# Altium PCB DIOT_SYS_extender_card.PcbDoc (part 5 of 6)
Units mm, origin at the board's own origin, x right, y up, seen from the top; angles counter-clockwise.
Board outline 280.04 x 100 mm, 6 copper layers (Top Layer, L2GND, L3, L4, L5GND, Bottom Layer), stack 1.558 mm thick; 18 components, 344 nets, 1062 pads, 179 vias.
Unrouted connection lines stored in the file: 389.
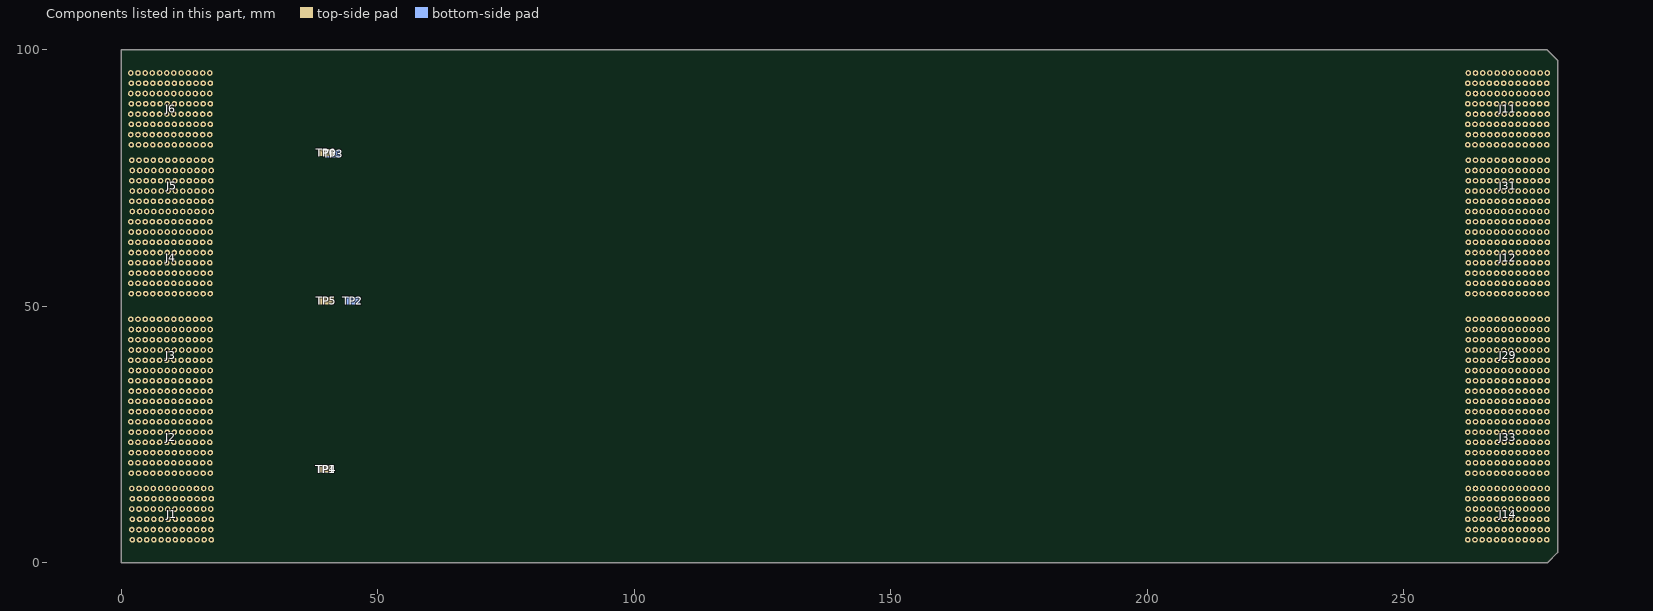
[diagram p9: the components of this part, seen from the top]

## Other copper (continued)
Bottom Layer:
  rectangle net SHARED_BUS_2: 42.545,8.951 42.774,9.212
  rectangle net SHARED_BUS_4: 42.545,9.346 42.878,9.514
  rectangle net GA3: 52.608,9.845 52.921,10.086
  rectangle net GA2: 52.596,10.222 52.928,10.466
  rectangle net PWR_FAIL_N: 47.651,12.132 47.853,12.389
  rectangle net PWRBTN_N: 47.518,12.524 47.923,12.755
  rectangle net SLOT1.LVDS_4_N: 42.609,14.266 42.884,14.387
  rectangle net SLOT1.LVDS_4_P: 42.571,14.522 42.878,14.634
  rectangle net SLOT1.LVDS_6_N: 52.515,16.562 52.919,16.759
  rectangle net SLOT1.LVDS_10_N: 47.665,18.711 48.003,18.895
  rectangle net SLOT1.LVDS_10_P: 47.651,19.03 48.097,19.081
  rectangle net SLOT2.LVDS_6_N: 42.545,21.4 42.911,21.57
  rectangle net SLOT2.LVDS_6_P: 42.526,21.705 42.853,21.825
  rectangle net SLOT2.LVDS_10_N: 52.515,23.338 52.86,23.535
  rectangle net SLOT2.LVDS_10_P: 52.515,23.674 52.86,23.818
  rectangle net 4_DIFF_15_N: 47.505,25.366 47.76,25.482
  rectangle net 4_DIFF_15_P: 47.505,25.616 47.757,25.735
  rectangle net 8_DIFF_15_N: 42.609,27.365 42.819,27.485
  rectangle net 8_DIFF_15_P: 42.49,27.619 42.818,27.734
  rectangle net F_IO0: 52.596,29.3 52.869,29.491
  rectangle net P_IO0: 52.515,29.626 52.933,29.738
  rectangle net F_IO1: 47.505,31.363 47.825,31.6
  rectangle net SLOT4.LVDS_2_N: 42.609,33.22 42.857,33.336
  rectangle net SLOT4.LVDS_2_P: 42.545,33.471 42.849,33.587
  rectangle net SLOT8.LVDS_2_N: 52.624,35.351 52.829,35.469
  rectangle net SLOT8.LVDS_2_P: 52.605,35.604 52.99,35.663
  rectangle net SLOT3.LVDS_1_N: 47.518,37.183 47.885,37.33
  rectangle net SLOT3.LVDS_1_P: 47.25,37.465 47.908,37.583
  rectangle net SLOT5.LVDS_1_N: 42.539,39.183 42.901,39.365
  rectangle net SLOT5.LVDS_1_P: 42.539,39.499 42.85,39.615
  rectangle net SLOT7.LVDS_1_P: 52.539,41.56 52.822,41.675
  rectangle net SLOT7.LVDS_1_N: 52.531,41.31 52.819,41.425
  rectangle net SLOT2.LVDS_4_N: 47.518,43.283 47.845,43.427
  rectangle net SLOT2.LVDS_4_P: 47.505,43.579 47.845,43.763
  rectangle net SLOT4.LVDS_4_N: 42.49,45.268 42.956,45.388
  rectangle net SLOT4.LVDS_4_P: 42.49,45.523 42.934,45.698
  rectangle net SLOT6.LVDS_4_N: 52.515,47.401 52.84,47.56
  rectangle net SLOT6.LVDS_4_P: 52.515,47.695 52.84,47.881
  rectangle net SLOT8.LVDS_4_N: 47.518,48.893 47.93,49.064
  rectangle net SLOT8.LVDS_4_P: 47.549,49.199 47.93,49.373
  rectangle net SLOT3.LVDS_6_N: 42.49,53.283 43.036,53.443
  rectangle net SLOT3.LVDS_6_P: 42.545,53.577 43.003,53.69
  rectangle net SLOT3.LVDS_10_N: 52.605,54.417 52.877,54.535
  rectangle net SLOT4.LVDS_6_N: 47.505,56.338 47.978,56.504
  rectangle net SLOT4.LVDS_6_P: 47.56,56.638 47.97,56.75
  rectangle net SLOT4.LVDS_10_N: 42.545,58.446 43,58.566
  rectangle net SLOT4.LVDS_10_P: 42.49,58.7 43.094,58.807
  rectangle net SLOT5.LVDS_6_N: 52.515,60.496 52.915,60.613
  rectangle net SLOT5.LVDS_6_P: 52.515,60.748 52.84,60.918
  rectangle net SLOT5.LVDS_10_N: 47.549,62.389 47.971,62.506
  rectangle net SLOT5.LVDS_10_P: 47.514,62.64 47.978,62.818
  rectangle net SLOT6.LVDS_6_N: 42.545,64.338 42.901,64.513
  rectangle net SLOT6.LVDS_6_P: 42.539,64.648 42.901,64.818
  rectangle net SLOT6.LVDS_10_N: 52.54,66.338 52.925,66.52
  rectangle net SLOT6.LVDS_10_P: 52.574,66.655 53.013,66.771
  rectangle net SLOT7.LVDS_6_N: 47.568,68.438 47.885,68.59
  rectangle net SLOT7.LVDS_6_P: 47.607,68.724 47.885,68.917
  rectangle net SLOT7.LVDS_10_N: 42.597,70.338 42.901,70.503
  rectangle net SLOT7.LVDS_10_P: 42.539,70.637 42.956,70.756
  rectangle net SLOT8.LVDS_6_N: 52.664,72.389 52.868,72.51
  rectangle net SLOT8.LVDS_6_P: 52.629,72.645 52.866,72.764
  rectangle net SLOT8.LVDS_10_N: 47.607,74.361 48.001,74.48
  rectangle net SLOT8.LVDS_10_P: 47.584,74.615 47.912,74.79
  rectangle net 4_PE_CLK_N: 52.629,77.328 52.854,77.448
  rectangle net 4_PE_CLK_P: 52.629,77.583 53.023,77.696
  rectangle net 8_PE_CLK_N: 47.584,79.438 47.912,79.608
  rectangle net 8_PE_CLK_P: 47.625,79.739 47.97,79.856
  rectangle net 5_SERVMOD: 52.619,80.956 52.939,81.177
  rectangle net SLOT1.LVDS_14_N: 47.549,82.507 47.816,82.626
  rectangle net SLOT1.LVDS_14_P: 47.481,82.761 47.811,82.874
  rectangle net SLOT2.LVDS_14_N: 42.562,83.325 42.811,83.445
  rectangle net SLOT2.LVDS_14_P: 42.49,83.579 42.881,83.696
  rectangle net SLOT3.LVDS_14_P: 52.582,85.685 52.788,85.799
  rectangle net SLOT3.LVDS_14_N: 52.515,85.43 52.784,85.55
  rectangle net SLOT4.LVDS_14_N: 47.549,87.397 47.816,87.515
  rectangle net SLOT4.LVDS_14_P: 47.479,87.65 47.812,87.77
  rectangle net SLOT5.LVDS_14_N: 42.562,89.384 42.828,89.5
  rectangle net SLOT5.LVDS_14_P: 42.49,89.637 42.885,89.818
  rectangle net SLOT6.LVDS_14_N: 52.54,91.319 52.83,91.435
  rectangle net SLOT6.LVDS_14_P: 52.535,91.57 52.925,91.718
  rectangle net SLOT7.LVDS_14_N: 47.479,93.338 47.8,93.492
  rectangle net SLOT7.LVDS_14_P: 47.3,93.626 47.729,93.743
  rectangle net SLOT8.LVDS_14_N: 42.49,95.493 42.74,95.61
  rectangle net SLOT8.LVDS_14_P: 42.49,95.745 42.739,95.864
  region net SHARED_BUS_2: 42.92,8.92 42.774,9.095 42.526,8.888 42.671,8.713
  region net GA3: 53.002,9.793 52.857,9.969 52.608,9.762 52.754,9.587
  region net PWR_FAIL_N: 47.998,12.092 47.853,12.267 47.604,12.061 47.75,11.885
  region net SLOT1.LVDS_4_N: 43.03,14.091 42.884,14.266 42.636,14.06 42.781,13.885
  region net SLOT1.LVDS_6_N: 53.022,16.464 52.877,16.639 52.628,16.432 52.774,16.257
  region net SLOT1.LVDS_10_N: 48.097,18.603 47.951,18.778 47.703,18.571 47.848,18.396
  region net SLOT2.LVDS_6_N: 42.999,21.276 42.854,21.451 42.605,21.245 42.751,21.069
  region net SLOT2.LVDS_10_N: 52.933,23.245 52.787,23.42 52.539,23.214 52.684,23.039
  region net 4_DIFF_15_N: 47.905,25.191 47.76,25.366 47.511,25.159 47.657,24.984
  region net 8_DIFF_15_N: 42.965,27.19 42.819,27.365 42.571,27.159 42.716,26.983
  region net F_IO0: 52.954,29.2 52.808,29.375 52.56,29.168 52.705,28.993
  region net SLOT4.LVDS_2_N: 43.003,33.045 42.857,33.22 42.609,33.013 42.755,32.838
  region net SLOT8.LVDS_2_N: 52.975,35.176 52.829,35.351 52.581,35.145 52.727,34.969
  region net SLOT3.LVDS_1_N: 47.951,37.038 47.805,37.213 47.557,37.006 47.703,36.831
  region net SLOT5.LVDS_1_N: 42.993,39.072 42.847,39.247 42.599,39.04 42.745,38.865
  region net SLOT7.LVDS_1_N: 52.965,41.134 52.819,41.31 52.571,41.103 52.717,40.928
  region net SLOT2.LVDS_4_N: 47.912,43.132 47.767,43.308 47.518,43.101 47.664,42.926
  region net SLOT4.LVDS_4_N: 42.94,45.092 42.794,45.268 42.545,45.061 42.691,44.886
  region net SLOT6.LVDS_4_N: 52.923,47.262 52.777,47.437 52.529,47.23 52.674,47.055
  region net SLOT8.LVDS_4_N: 48.001,48.776 47.855,48.951 47.607,48.744 47.752,48.569
  region net SLOT3.LVDS_6_N: 42.987,53.154 42.841,53.329 42.593,53.122 42.738,52.947
  region net SLOT3.LVDS_10_N: 53.023,54.242 52.877,54.417 52.629,54.211 52.774,54.036
  region net SLOT4.LVDS_6_N: 47.962,56.211 47.816,56.386 47.568,56.179 47.714,56.004
  region net SLOT4.LVDS_10_N: 43.036,58.271 42.89,58.446 42.642,58.24 42.787,58.064
  region net SLOT5.LVDS_6_N: 52.909,60.321 52.763,60.496 52.515,60.289 52.66,60.114
  region net SLOT5.LVDS_10_N: 47.958,62.214 47.812,62.389 47.564,62.182 47.709,62.007
  region net SLOT6.LVDS_6_N: 42.994,64.22 42.848,64.395 42.6,64.189 42.745,64.014
  region net SLOT6.LVDS_10_N: 53.005,66.225 52.859,66.4 52.611,66.194 52.757,66.019
  region net SLOT7.LVDS_6_N: 47.951,68.3 47.806,68.475 47.557,68.268 47.703,68.093
  region net SLOT7.LVDS_10_N: 43,70.213 42.854,70.388 42.606,70.182 42.751,70.006
  region net SLOT8.LVDS_6_N: 53.013,72.214 52.868,72.389 52.619,72.183 52.765,72.008
  region net SLOT8.LVDS_10_N: 47.971,74.186 47.825,74.361 47.577,74.154 47.722,73.979
  region net 4_PE_CLK_N: 52.999,77.153 52.854,77.328 52.605,77.122 52.751,76.947
  region net 8_PE_CLK_N: 47.97,79.309 47.824,79.484 47.576,79.277 47.721,79.102
  region net SLOT2.LVDS_14_N: 42.956,83.15 42.811,83.325 42.562,83.119 42.708,82.943
  region net SLOT1.LVDS_14_N: 47.962,82.332 47.816,82.507 47.568,82.3 47.713,82.125
  region net SLOT3.LVDS_14_N: 52.929,85.255 52.784,85.43 52.535,85.223 52.681,85.048
  region net SLOT4.LVDS_14_N: 47.962,87.222 47.816,87.397 47.568,87.191 47.713,87.016
  region net SLOT5.LVDS_14_N: 42.973,89.208 42.828,89.384 42.579,89.177 42.725,89.002
  region net SLOT6.LVDS_14_N: 52.976,91.144 52.83,91.319 52.582,91.113 52.727,90.937
  region net SLOT7.LVDS_14_N: 47.873,93.196 47.728,93.371 47.479,93.165 47.625,92.989
  region net SLOT8.LVDS_14_N: 42.885,95.318 42.74,95.493 42.491,95.286 42.637,95.111
  region net SHARED_BUS_4: 42.773,9.462 42.918,9.637 42.67,9.844 42.524,9.668
  region net PWRBTN_N: 47.845,12.645 47.991,12.82 47.742,13.026 47.597,12.851
  region net GA2: 52.845,10.34 52.99,10.515 52.742,10.722 52.596,10.547
  region net PWR_FAIL_N: 47.75,12.389 47.15,12.389 47.15,11.889 47.75,11.889
  region net PWRBTN_N: 47.75,13.024 47.15,13.024 47.15,12.524 47.75,12.524
  region net SLOT1.LVDS_4_P: 42.878,14.634 43.024,14.809 42.775,15.016 42.629,14.84
  region net SLOT1.LVDS_6_P: 52.882,17.013 53.028,17.188 52.779,17.395 52.634,17.22
  region net SLOT1.LVDS_10_P: 47.947,19.145 48.093,19.32 47.844,19.527 47.699,19.352
  region net SLOT2.LVDS_6_P: 42.853,21.825 42.999,22 42.75,22.207 42.605,22.032
  region net SLOT2.LVDS_10_P: 52.788,23.794 52.933,23.969 52.685,24.176 52.539,24.001
  region net 4_DIFF_15_P: 47.757,25.735 47.903,25.91 47.654,26.116 47.509,25.941
  region net 8_DIFF_15_P: 42.818,27.734 42.963,27.909 42.715,28.115 42.569,27.94
  region net P_IO0: 52.808,29.738 52.953,29.914 52.705,30.12 52.559,29.945
  region net F_IO1: 47.753,31.479 47.899,31.654 47.651,31.861 47.505,31.686
  region net SLOT4.LVDS_2_P: 42.849,33.587 42.995,33.762 42.746,33.968 42.601,33.793
  region net SLOT8.LVDS_2_P: 52.831,35.724 52.977,35.899 52.728,36.106 52.583,35.931
  region net SLOT3.LVDS_1_P: 47.807,37.583 47.952,37.758 47.704,37.965 47.558,37.79
  region net SLOT5.LVDS_1_P: 42.85,39.615 42.995,39.79 42.747,39.997 42.601,39.822
  region net SLOT7.LVDS_1_P: 52.822,41.675 52.968,41.85 52.719,42.056 52.574,41.881
  region net SLOT2.LVDS_4_P: 47.762,43.678 47.908,43.853 47.659,44.059 47.514,43.884
  region net SLOT4.LVDS_4_P: 42.788,45.643 42.934,45.818 42.685,46.025 42.539,45.85
  region net SLOT6.LVDS_4_P: 52.779,47.813 52.925,47.988 52.676,48.195 52.531,48.019
  region net SLOT8.LVDS_4_P: 47.856,49.318 48.001,49.493 47.753,49.7 47.607,49.525
  region net SLOT3.LVDS_6_P: 42.833,53.69 42.979,53.865 42.73,54.072 42.585,53.897
  region net SLOT3.LVDS_10_P: 52.872,54.789 53.018,54.964 52.769,55.171 52.624,54.996
  region net SLOT4.LVDS_6_P: 47.809,56.75 47.955,56.925 47.706,57.132 47.56,56.957
  region net SLOT4.LVDS_10_P: 42.889,58.807 43.035,58.982 42.786,59.189 42.641,59.014
  region net SLOT5.LVDS_6_P: 52.769,60.866 52.915,61.041 52.666,61.248 52.521,61.073
  region net SLOT5.LVDS_10_P: 47.812,62.757 47.958,62.932 47.709,63.138 47.564,62.963
  region net SLOT6.LVDS_6_P: 42.851,64.764 42.997,64.939 42.748,65.145 42.603,64.97
  region net SLOT6.LVDS_10_P: 52.86,66.771 53.006,66.946 52.757,67.153 52.612,66.977
  region net SLOT7.LVDS_6_P: 47.797,68.847 47.943,69.022 47.695,69.229 47.549,69.054
  region net SLOT7.LVDS_10_P: 42.846,70.756 42.991,70.931 42.743,71.138 42.597,70.963
  region net SLOT8.LVDS_6_P: 52.866,72.764 53.012,72.939 52.763,73.145 52.617,72.97
  region net SLOT8.LVDS_10_P: 47.825,74.734 47.971,74.909 47.723,75.115 47.577,74.94
  region net 3_SERVMOD: 42.829,76.206 42.975,76.381 42.726,76.588 42.581,76.413
  region net 4_PE_CLK_P: 52.859,77.696 53.004,77.871 52.756,78.077 52.61,77.902
  region net 8_PE_CLK_P: 47.832,79.856 47.978,80.031 47.73,80.238 47.584,80.063
  region net 5_SERVMOD: 52.877,81.079 53.023,81.254 52.774,81.461 52.629,81.286
  region net SLOT1.LVDS_14_P: 47.811,82.874 47.957,83.049 47.708,83.256 47.563,83.081
  region net SLOT2.LVDS_14_P: 42.816,83.696 42.962,83.871 42.714,84.078 42.568,83.903
  region net SLOT3.LVDS_14_P: 52.788,85.799 52.934,85.974 52.685,86.181 52.54,86.006
  region net SLOT4.LVDS_14_P: 47.812,87.77 47.958,87.945 47.709,88.151 47.564,87.976
  region net SLOT5.LVDS_14_P: 42.828,89.754 42.973,89.929 42.725,90.136 42.579,89.961
  region net SLOT6.LVDS_14_P: 52.835,91.689 52.981,91.864 52.732,92.071 52.587,91.896
  region net SLOT7.LVDS_14_P: 47.729,93.743 47.875,93.918 47.626,94.125 47.481,93.95
  region net SLOT8.LVDS_14_P: 42.739,95.864 42.885,96.039 42.636,96.246 42.49,96.071
  region net 8_SERVMOD: 33.07,78.39 32.47,78.39 32.47,77.89 33.07,77.89
  region net SHARED_BUS_2: 42.673,9.212 42.073,9.212 42.073,8.712 42.673,8.712
  region net SHARED_BUS_4: 42.673,9.846 42.073,9.846 42.073,9.346 42.673,9.346
  region net SLOT1.LVDS_4_N: 42.782,14.387 42.182,14.387 42.182,13.887 42.782,13.887
  region net GA2: 52.751,10.722 52.151,10.722 52.151,10.222 52.751,10.222
  region net GA3: 52.751,10.087 52.151,10.087 52.151,9.587 52.751,9.587
  region net SLOT1.LVDS_5_P: 37.956,11.411 37.356,11.411 37.356,10.911 37.956,10.911
  region net SLOT1.LVDS_5_N: 37.956,12.046 37.356,12.046 37.356,11.546 37.956,11.546
  region net SLOT1.LVDS_0_N: 27.952,9.451 27.352,9.451 27.352,8.951 27.952,8.951
  region net P12V0: 27.975,5.25 27.375,5.25 27.375,4.75 27.975,4.75
  region net 3_SERVMOD: 42.734,76.584 42.134,76.584 42.134,76.084 42.734,76.084
  region net 5_SERVMOD: 52.771,81.456 52.171,81.456 52.171,80.956 52.771,80.956
  region net SLOT1.LVDS_4_P: 42.782,15.022 42.182,15.022 42.182,14.522 42.782,14.522
  region net SLOT1.LVDS_6_N: 52.776,16.759 52.176,16.759 52.176,16.259 52.776,16.259
  region net SLOT1.LVDS_6_P: 52.776,17.393 52.176,17.393 52.176,16.893 52.776,16.893
  region net SLOT1.LVDS_10_N: 47.85,18.895 47.25,18.895 47.25,18.395 47.85,18.395
  region net SLOT1.LVDS_10_P: 47.85,19.53 47.25,19.53 47.25,19.03 47.85,19.03
  region net SLOT2.LVDS_6_N: 42.752,21.57 42.152,21.57 42.152,21.07 42.752,21.07
  region net SLOT2.LVDS_6_P: 42.752,22.205 42.152,22.205 42.152,21.705 42.752,21.705
  region net SLOT2.LVDS_10_N: 52.687,23.54 52.087,23.54 52.087,23.04 52.687,23.04
  region net SLOT2.LVDS_10_P: 52.687,24.174 52.087,24.174 52.087,23.674 52.687,23.674
  region net 4_DIFF_15_N: 47.659,25.482 47.059,25.482 47.059,24.982 47.659,24.982
  region net 4_DIFF_15_P: 47.659,26.116 47.059,26.116 47.059,25.616 47.659,25.616
  region net 8_DIFF_15_N: 42.715,27.485 42.115,27.485 42.115,26.985 42.715,26.985
  region net 8_DIFF_15_P: 42.715,28.119 42.115,28.119 42.115,27.619 42.715,27.619
  region net F_IO0: 52.706,29.491 52.106,29.491 52.106,28.991 52.706,28.991
  region net P_IO0: 52.706,30.126 52.106,30.126 52.106,29.626 52.706,29.626
  region net F_IO1: 47.653,31.863 47.053,31.863 47.053,31.363 47.653,31.363
  region net SLOT4.LVDS_2_N: 42.755,33.336 42.155,33.336 42.155,32.836 42.755,32.836
  region net SLOT4.LVDS_2_P: 42.755,33.971 42.155,33.971 42.155,33.471 42.755,33.471
  region net SLOT8.LVDS_2_N: 52.73,35.469 52.13,35.469 52.13,34.969 52.73,34.969
  region net SLOT8.LVDS_2_P: 52.73,36.104 52.13,36.104 52.13,35.604 52.73,35.604
  region net SLOT3.LVDS_1_N: 47.705,37.33 47.105,37.33 47.105,36.83 47.705,36.83
  region net SLOT3.LVDS_1_P: 47.705,37.965 47.105,37.965 47.105,37.465 47.705,37.465
  region net SLOT5.LVDS_1_N: 42.746,39.365 42.146,39.365 42.146,38.865 42.746,38.865
  region net SLOT5.LVDS_1_P: 42.746,39.999 42.146,39.999 42.146,39.499 42.746,39.499
  region net SLOT7.LVDS_1_N: 52.719,41.425 52.119,41.425 52.119,40.925 52.719,40.925
  region net SLOT7.LVDS_1_P: 52.719,42.06 52.119,42.06 52.119,41.56 52.719,41.56
  region net SLOT2.LVDS_4_N: 47.665,43.427 47.065,43.427 47.065,42.927 47.665,42.927
  region net SLOT2.LVDS_4_P: 47.665,44.062 47.065,44.062 47.065,43.562 47.665,43.562
  region net SLOT4.LVDS_4_N: 42.696,45.388 42.096,45.388 42.096,44.888 42.696,44.888
  region net SLOT4.LVDS_4_P: 42.696,46.023 42.096,46.023 42.096,45.523 42.696,45.523
  region net SLOT6.LVDS_4_N: 52.676,47.56 52.076,47.56 52.076,47.06 52.676,47.06
  region net SLOT6.LVDS_4_P: 52.676,48.195 52.076,48.195 52.076,47.695 52.676,47.695
  region net SLOT8.LVDS_4_N: 47.756,49.064 47.156,49.064 47.156,48.564 47.756,48.564
  region net SLOT8.LVDS_4_P: 47.756,49.699 47.156,49.699 47.156,49.199 47.756,49.199
  region net SLOT3.LVDS_6_N: 42.74,53.443 42.14,53.443 42.14,52.943 42.74,52.943
  region net SLOT3.LVDS_6_P: 42.74,54.077 42.14,54.077 42.14,53.577 42.74,53.577
  region net SLOT3.LVDS_10_N: 52.776,54.535 52.176,54.535 52.176,54.035 52.776,54.035
  region net SLOT3.LVDS_10_P: 52.776,55.17 52.176,55.17 52.176,54.67 52.776,54.67
  region net SLOT4.LVDS_6_N: 47.712,56.504 47.112,56.504 47.112,56.004 47.712,56.004
  region net SLOT4.LVDS_6_P: 47.712,57.138 47.112,57.138 47.112,56.638 47.712,56.638
  region net SLOT4.LVDS_10_N: 42.785,58.566 42.185,58.566 42.185,58.066 42.785,58.066
  region net SLOT4.LVDS_10_P: 42.785,59.2 42.185,59.2 42.185,58.7 42.785,58.7
  region net SLOT5.LVDS_6_N: 52.664,60.613 52.064,60.613 52.064,60.113 52.664,60.113
  region net SLOT5.LVDS_6_P: 52.664,61.248 52.064,61.248 52.064,60.748 52.664,60.748
  region net SLOT5.LVDS_10_N: 47.71,62.506 47.11,62.506 47.11,62.006 47.71,62.006
  region net SLOT5.LVDS_10_P: 47.71,63.14 47.11,63.14 47.11,62.64 47.71,62.64
  region net SLOT6.LVDS_6_N: 42.747,64.513 42.147,64.513 42.147,64.013 42.747,64.013
  region net SLOT6.LVDS_6_P: 42.747,65.148 42.147,65.148 42.147,64.648 42.747,64.648
  region net SLOT6.LVDS_10_N: 52.758,66.52 52.158,66.52 52.158,66.02 52.758,66.02
  region net SLOT6.LVDS_10_P: 52.758,67.155 52.158,67.155 52.158,66.655 52.758,66.655
  region net SLOT7.LVDS_6_N: 47.703,68.59 47.103,68.59 47.103,68.09 47.703,68.09
  region net SLOT7.LVDS_6_P: 47.703,69.224 47.103,69.224 47.103,68.724 47.703,68.724
  region net SLOT7.LVDS_10_N: 42.751,70.503 42.151,70.503 42.151,70.003 42.751,70.003
  region net SLOT7.LVDS_10_P: 42.751,71.137 42.151,71.137 42.151,70.637 42.751,70.637
  region net SLOT8.LVDS_6_N: 52.766,72.51 52.166,72.51 52.166,72.01 52.766,72.01
  region net SLOT8.LVDS_6_P: 52.766,73.145 52.166,73.145 52.166,72.645 52.766,72.645
  region net SLOT8.LVDS_10_N: 47.728,74.48 47.128,74.48 47.128,73.98 47.728,73.98
  region net SLOT8.LVDS_10_P: 47.728,75.115 47.128,75.115 47.128,74.615 47.728,74.615
  region net 4_PE_CLK_N: 52.753,77.448 52.153,77.448 52.153,76.948 52.753,76.948
  region net 4_PE_CLK_P: 52.753,78.083 52.153,78.083 52.153,77.583 52.753,77.583
  region net 8_PE_CLK_N: 47.729,79.604 47.129,79.604 47.129,79.104 47.729,79.104
  region net 8_PE_CLK_P: 47.729,80.239 47.129,80.239 47.129,79.739 47.729,79.739
  region net SLOT1.LVDS_14_N: 47.711,82.626 47.111,82.626 47.111,82.126 47.711,82.126
  region net SLOT1.LVDS_14_P: 47.711,83.261 47.111,83.261 47.111,82.761 47.711,82.761
  region net SLOT2.LVDS_14_N: 42.713,83.445 42.113,83.445 42.113,82.945 42.713,82.945
  region net SLOT2.LVDS_14_P: 42.713,84.079 42.113,84.079 42.113,83.579 42.713,83.579
  region net SLOT3.LVDS_14_N: 52.683,85.55 52.083,85.55 52.083,85.05 52.683,85.05
  region net SLOT3.LVDS_14_P: 52.683,86.185 52.083,86.185 52.083,85.685 52.683,85.685
  region net SLOT4.LVDS_14_N: 47.715,87.515 47.115,87.515 47.115,87.015 47.715,87.015
  region net SLOT4.LVDS_14_P: 47.715,88.15 47.115,88.15 47.115,87.65 47.715,87.65
  region net SLOT5.LVDS_14_N: 42.73,89.503 42.13,89.503 42.13,89.003 42.73,89.003
  region net SLOT5.LVDS_14_P: 42.73,90.137 42.13,90.137 42.13,89.637 42.73,89.637
  region net SLOT6.LVDS_14_N: 52.731,91.435 52.131,91.435 52.131,90.935 52.731,90.935
  region net SLOT6.LVDS_14_P: 52.731,92.07 52.131,92.07 52.131,91.57 52.731,91.57
  region net SLOT7.LVDS_14_N: 47.63,93.492 47.03,93.492 47.03,92.992 47.63,92.992
  region net SLOT7.LVDS_14_P: 47.63,94.126 47.03,94.126 47.03,93.626 47.63,93.626
  region net SLOT8.LVDS_14_N: 42.641,95.61 42.041,95.61 42.041,95.11 42.641,95.11
  region net SLOT8.LVDS_14_P: 42.641,96.245 42.041,96.245 42.041,95.745 42.641,95.745
  region net 1_PE_CLK_N: 37.942,77.248 37.342,77.248 37.342,76.748 37.942,76.748
  region net 1_PE_CLK_P: 37.942,77.883 37.342,77.883 37.342,77.383 37.942,77.383
  region net CPCIS_I2C_SCL: 32.949,8.115 32.349,8.115 32.349,7.615 32.949,7.615
  region net CPCIS_I2C_SDA: 32.949,7.48 32.349,7.48 32.349,6.98 32.949,6.98
  region net SYSEN_N: 47.7,6.825 47.1,6.825 47.1,6.325 47.7,6.325
  region net SLOT1.LVDS_0_P: 27.952,10.086 27.352,10.086 27.352,9.586 27.952,9.586
  region net MGT1_Rx_P: 32.952,14.086 32.352,14.086 32.352,13.586 32.952,13.586
  region net MGT1_Rx_N: 32.952,13.451 32.352,13.451 32.352,12.951 32.952,12.951
  region net SLOT1.LVDS_7_P: 27.954,16.211 27.354,16.211 27.354,15.711 27.954,15.711
  region net SLOT1.LVDS_7_N: 27.954,15.576 27.354,15.576 27.354,15.076 27.954,15.076
  region net MGT2_Tx_N: 37.95,21.046 37.35,21.046 37.35,20.546 37.95,20.546
  region net MGT2_Tx_P: 37.95,20.411 37.35,20.411 37.35,19.911 37.95,19.911
  region net MGT2_Rx_P: 32.943,23.086 32.343,23.086 32.343,22.586 32.943,22.586
  region net MGT2_Rx_N: 32.943,22.451 32.343,22.451 32.343,21.951 32.943,21.951
  region net SLOT2.LVDS_7_P: 27.95,25.086 27.35,25.086 27.35,24.586 27.95,24.586
  region net SLOT2.LVDS_7_N: 27.95,24.451 27.35,24.451 27.35,23.951 27.95,23.951
  region net 1_DIFF_15_P: 37.936,27.061 37.336,27.061 37.336,26.561 37.936,26.561
  region net 1_DIFF_15_N: 37.936,26.426 37.336,26.426 37.336,25.926 37.936,25.926
  region net 5_DIFF_15_P: 32.953,29.086 32.353,29.086 32.353,28.586 32.953,28.586
  region net 5_DIFF_15_N: 32.953,28.451 32.353,28.451 32.353,27.951 32.953,27.951
  region net P_IO1: 27.938,31.171 27.338,31.171 27.338,30.671 27.938,30.671
  region net P_IO2: 27.938,30.536 27.338,30.536 27.338,30.036 27.938,30.036
  region net SLOT5.LVDS_2_N: 37.949,33.071 37.349,33.071 37.349,32.571 37.949,32.571
  region net SLOT5.LVDS_2_P: 37.949,32.436 37.349,32.436 37.349,31.936 37.949,31.936
  region net SLOT2.LVDS_0_N: 32.936,35.071 32.336,35.071 32.336,34.571 32.936,34.571
  region net SLOT2.LVDS_0_P: 32.936,34.436 32.336,34.436 32.336,33.936 32.936,33.936
  region net SLOT4.LVDS_0_N: 27.93,37.071 27.33,37.071 27.33,36.571 27.93,36.571
  region net SLOT4.LVDS_0_P: 27.93,36.436 27.33,36.436 27.33,35.936 27.93,35.936
  region net SLOT6.LVDS_0_N: 37.96,39.046 37.36,39.046 37.36,38.546 37.96,38.546
  region net SLOT6.LVDS_0_P: 37.96,38.411 37.36,38.411 37.36,37.911 37.96,37.911
  region net SLOT8.LVDS_0_N: 32.947,41.071 32.347,41.071 32.347,40.571 32.947,40.571
  region net SLOT8.LVDS_0_P: 32.947,40.436 32.347,40.436 32.347,39.936 32.947,39.936
  region net SLOT3.LVDS_3_N: 27.945,43.049 27.345,43.049 27.345,42.549 27.945,42.549
  region net SLOT3.LVDS_3_P: 27.945,42.414 27.345,42.414 27.345,41.914 27.945,41.914
  region net SLOT5.LVDS_3_N: 37.946,45.046 37.346,45.046 37.346,44.546 37.946,44.546
  region net SLOT5.LVDS_3_P: 37.946,44.411 37.346,44.411 37.346,43.911 37.946,43.911
  region net SLOT7.LVDS_3_N: 32.929,47.071 32.329,47.071 32.329,46.571 32.929,46.571
  region net SLOT7.LVDS_3_P: 32.929,46.436 32.329,46.436 32.329,45.936 32.929,45.936
  region net MGT3_RxC_P: 27.943,54.091 27.343,54.091 27.343,53.591 27.943,53.591
  region net MGT3_RxC_N: 27.943,53.456 27.343,53.456 27.343,52.956 27.943,52.956
  region net SLOT3.LVDS_8_P: 37.946,56.01 37.346,56.01 37.346,55.51 37.946,55.51
  region net SLOT3.LVDS_8_N: 37.946,55.376 37.346,55.376 37.346,54.876 37.946,54.876
  region net MGT4_RxC_P: 32.957,58.086 32.357,58.086 32.357,57.586 32.957,57.586
  region net MGT4_RxC_N: 32.957,57.451 32.357,57.451 32.357,56.951 32.957,56.951
  region net SLOT4.LVDS_7_P: 27.95,60.051 27.35,60.051 27.35,59.551 27.95,59.551
  region net SLOT4.LVDS_7_N: 27.95,59.416 27.35,59.416 27.35,58.916 27.95,58.916
  region net MGT5_RxC_P: 37.943,62.086 37.343,62.086 37.343,61.586 37.943,61.586
  region net MGT5_RxC_N: 37.943,61.451 37.343,61.451 37.343,60.951 37.943,60.951
  region net SLOT5.LVDS_8_P: 32.935,64.077 32.335,64.077 32.335,63.577 32.935,63.577
  region net SLOT5.LVDS_8_N: 32.935,63.443 32.335,63.443 32.335,62.943 32.935,62.943
  region net MGT6_RxC_P: 27.939,66.082 27.339,66.082 27.339,65.582 27.939,65.582
  region net MGT6_RxC_N: 27.939,65.447 27.339,65.447 27.339,64.947 27.939,64.947
  region net SLOT6.LVDS_8_P: 37.932,68.051 37.332,68.051 37.332,67.551 37.932,67.551
  region net SLOT6.LVDS_8_N: 37.932,67.416 37.332,67.416 37.332,66.916 37.932,66.916
  region net MGT7_RxC_P: 32.957,70.101 32.357,70.101 32.357,69.601 32.957,69.601
  region net MGT7_RxC_N: 32.957,69.467 32.357,69.467 32.357,68.967 32.957,68.967
  region net SLOT7.LVDS_8_P: 27.95,72.063 27.35,72.063 27.35,71.563 27.95,71.563
  region net SLOT7.LVDS_8_N: 27.95,71.429 27.35,71.429 27.35,70.929 27.95,70.929
  region net MGT8_RxC_P: 37.965,74.086 37.365,74.086 37.365,73.586 37.965,73.586
  region net MGT8_RxC_N: 37.965,73.451 37.365,73.451 37.365,72.951 37.965,72.951
  region net SLOT8.LVDS_7_P: 33.07,76.124 32.47,76.124 32.47,75.624 33.07,75.624
  region net SLOT8.LVDS_7_N: 33.07,75.489 32.47,75.489 32.47,74.989 33.07,74.989
  region net 1_SERVMOD: 27.926,76.935 27.326,76.935 27.326,76.435 27.926,76.435
  region net 4_SERVMOD: 27.926,76.301 27.326,76.301 27.326,75.801 27.926,75.801
  region net 6_SERVMOD: 33.07,79.025 32.47,79.025 32.47,78.525 33.07,78.525
  region net 5_PE_CLK_P: 27.949,80.996 27.349,80.996 27.349,80.496 27.949,80.496
  region net 5_PE_CLK_N: 27.949,80.361 27.349,80.361 27.349,79.861 27.949,79.861
  region net SLOT1.LVDS_11_P: 32.927,83.146 32.327,83.146 32.327,82.646 32.927,82.646
  region net SLOT1.LVDS_11_N: 32.927,82.448 32.327,82.448 32.327,81.948 32.927,81.948
  region net SLOT2.LVDS_11_P: 27.954,85.077 27.354,85.077 27.354,84.577 27.954,84.577
  region net SLOT2.LVDS_11_N: 27.954,84.442 27.354,84.442 27.354,83.942 27.954,83.942
  region net SLOT3.LVDS_11_P: 37.938,87.111 37.338,87.111 37.338,86.611 37.938,86.611
  region net SLOT3.LVDS_11_N: 37.938,86.476 37.338,86.476 37.338,85.976 37.938,85.976
  region net SLOT4.LVDS_11_P: 32.938,89.066 32.338,89.066 32.338,88.566 32.938,88.566
  region net SLOT4.LVDS_11_N: 32.938,88.431 32.338,88.431 32.338,87.931 32.938,87.931
  region net SLOT7.LVDS_11_P: 32.927,95.151 32.327,95.151 32.327,94.651 32.927,94.651
  region net SLOT7.LVDS_11_N: 32.927,94.516 32.327,94.516 32.327,94.016 32.927,94.016
  region net SLOT8.LVDS_11_P: 27.935,97.186 27.335,97.186 27.335,96.686 27.935,96.686
  region net SLOT8.LVDS_11_N: 27.935,96.551 27.335,96.551 27.335,96.051 27.935,96.051
  region net SLOT5.LVDS_11_P: 27.954,91.086 27.354,91.086 27.354,90.586 27.954,90.586
  region net SLOT5.LVDS_11_N: 27.954,90.451 27.354,90.451 27.354,89.951 27.954,89.951
  region net SLOT6.LVDS_11_P: 37.802,93.036 37.202,93.036 37.202,92.536 37.802,92.536
  region net SLOT6.LVDS_11_N: 37.802,92.401 37.202,92.401 37.202,91.901 37.802,91.901
  text ".Layer_Name" at 168.8,-41.45 h1.91 r90
  text "6" at 167.287,-46.425 h2.54
L2GND (plane layer: these items are gaps in the copper):
  rectangle: 149.655,-47.625 169.918,-42.525
  rectangle: 139.495,-47.625 144.575,-42.545
  text "Ground Plane" at 148.05,-41.65 h1.9 r90
  text "2" at 146.48,-46.355 h2.54
L5GND (plane layer: these items are gaps in the copper):
  rectangle: 139.495,-47.625 160.5,-42.545
  rectangle: 164.155,-47.6 169.925,-42.52
  text "Ground Plane" at 163.125,-41.525 h1.9 r90
  text "5" at 161.425,-46.525 h2.54

## Silkscreen, mask and mechanical layers (free items; w line width, h text height)
Top Overlay:
  drawing of 7 lines, arcs and shapes, not listed
  text "System Board | Peripheral" at 27.21,97.993 h1
  text "P" at 54.818,97.343 h0.6
  text "P" at 39.875,96.405 h0.6
  text "S8L12" at 51.36,96.27 h0.7
  text "S8L13" at 36.164,95.358 h0.7
  text "P" at 49.773,95.278 h0.6
  text "N" at 54.818,95.258 h0.6
  text "N" at 39.875,94.32 h0.6
  text "S7L12" at 46.345,94.285 h0.7
  text "P" at 34.897,94.208 h0.6
  text "P" at 44.773,93.178 h0.6
  text "N" at 49.773,93.194 h0.6
  text "S7L13" at 31.218,93.145 h0.7
  text "P" at 29.79,92.249 h0.6
  text "S6L12" at 41.325,92.188 h0.7
  text "N" at 34.897,92.124 h0.6
  text "P" at 54.775,91.278 h0.6
  text "S6L13" at 26.132,91.159 h0.7
  text "N" at 44.773,91.094 h0.6
  text "P" at 39.819,90.343 h0.6
  text "S5L12" at 51.389,90.209 h0.7
  text "N" at 29.79,90.164 h0.6
  text "S5L13" at 36.124,89.262 h0.7
  text "N" at 54.775,89.194 h0.6
  text "P" at 49.775,89.178 h0.6
  text "Vext supplies are not supported in this extension board! / Do not use them for supply Peripheral Board!" at 67.952,89.121 h0.7
  text "N" at 39.819,88.259 h0.6
  text "P" at 34.774,88.229 h0.6
  text "S4L12" at 46.346,88.204 h0.7
  text "P" at 44.8,87.279 h0.6
  text "S4L13" at 31.085,87.153 h0.7
  text "N" at 49.775,87.094 h0.6
  text "P" at 29.794,86.345 h0.6
  text "S3L12" at 41.353,86.237 h0.7
  text "N" at 34.774,86.145 h0.6
  text "S3L13" at 26.113,85.231 h0.7
  text "P" at 54.78,85.238 h0.6
  text "N" at 44.8,85.194 h0.6
  text "Left descriptions are for System Board / Right descriptions are for Pherpheral Board" at 67.911,84.454 h0.7
  text "N" at 29.794,84.26 h0.6
  text "P" at 39.908,84.217 h0.6
  text "S2L12" at 51.403,84.204 h0.7
  text "P" at 49.789,83.274 h0.6
  text "N" at 54.78,83.153 h0.6
  text "S2L13" at 36.117,83.126 h0.7
  text "S1L12" at 46.353,82.204 h0.7
  text "N" at 39.908,82.132 h0.6
  text "L11" at 50.541,82.107 h0.7
  text "P" at 34.799,81.625 h0.6
  text "P" at 44.797,81.232 h0.6
  text "N" at 49.789,81.19 h0.6
  text "GND" at 39.056,80.977 h0.7
  text "S1L13" at 31.093,80.53 h0.7
  text "L14" at 35.5,80.483 h0.7
  text "CLK6" at 41.947,80.113 h0.7
  text "P" at 29.903,79.602 h0.6
  text "N" at 34.799,79.54 h0.6
  text "N" at 44.797,79.147 h0.6
  text "SERV7" at 51.138,78.673 h0.7
  text "CLK7" at 26.599,78.557 h0.7
  text "P" at 39.816,78.431 h0.6
  text "P" at 49.777,78.3 h0.6
  text "N" at 29.903,77.517 h0.6
  text "CLK3" at 36.491,77.334 h0.7
  text "CLK2" at 46.771,77.233 h0.7
  text "SERV2" at 30.911,76.479 h0.7
  text "N" at 39.816,76.347 h0.6
  text "P" at 44.782,76.289 h0.6
  text "N" at 49.777,76.215 h0.6
  text "S8L8" at 41.745,75.226 h0.7
  text "S8L9" at 26.65,74.247 h0.7
  text "P" at 54.78,74.244 h0.6
  text "N" at 44.782,74.205 h0.6
  text "P" at 39.916,73.385 h0.6
  text "M8Tx" at 51.718,73.171 h0.7
  text "S8L5" at 36.553,72.252 h0.7
  text "P" at 49.769,72.252 h0.6
  text "N" at 54.78,72.16 h0.6
  text "P" at 34.866,71.339 h0.6
  text "N" at 39.916,71.3 h0.6
  text "S7L7" at 46.786,71.196 h0.7
  text "S7L9" at 31.419,70.32 h0.7
  text "P" at 44.795,70.265 h0.6
  text "N" at 49.769,70.168 h0.6
  text "P" at 29.895,69.415 h0.6
  text "N" at 34.866,69.255 h0.6
  text "M7Tx" at 41.611,69.18 h0.7
  text "S7L5" at 26.468,68.354 h0.7
  text "N" at 44.795,68.18 h0.6
  text "P" at 54.775,68.178 h0.6
  text "IO40" at 55.517,67.71 h0.7
  text "N" at 29.895,67.331 h0.6
  text "P" at 39.875,67.289 h0.6
  text "S6L7" at 51.897,67.14 h0.7
  text "IO44" at 40.509,66.768 h0.7
  text "IO41" at 55.517,66.543 h0.7
  text "P" at 49.775,66.278 h0.6
  text "S6L9" at 36.437,66.232 h0.7
  text "N" at 54.775,66.094 h0.6
  text "IO32" at 50.513,65.794 h0.7
  text "IO45" at 40.509,65.601 h0.7
  text "P" at 34.822,65.349 h0.6
  text "N" at 39.875,65.205 h0.6
  text "M6Tx" at 46.29,65.19 h0.7
  text "IO36" at 35.589,64.735 h0.7
  text "IO33" at 50.513,64.628 h0.7
  text "S6L5" at 31.513,64.227 h0.7
  text "N" at 49.775,64.194 h0.6
  text "IO24" at 45.511,63.784 h0.7
  text "IO37" at 35.589,63.568 h0.7
  text "P" at 29.918,63.372 h0.6
  text "N" at 34.822,63.265 h0.6
  text "S5L7" at 41.782,63.208 h0.7
  text "IO28" at 30.582,62.766 h0.7
  text "IO25" at 45.511,62.617 h0.7
  text "S5L9" at 26.554,62.247 h0.7
  text "P" at 54.775,62.178 h0.6
  text "IO16" at 55.497,61.773 h0.7
  text "IO29" at 30.582,61.599 h0.7
  text "P" at 39.829,61.46 h0.6
  text "N" at 29.918,61.288 h0.6
  text "M5Tx" at 51.884,61.144 h0.7
  text "IO20" at 40.545,60.809 h0.7
  text "IO17" at 55.497,60.606 h0.7
  text "S5L5" at 35.947,60.332 h0.7
  text "P" at 49.775,60.178 h0.6
  text "N" at 54.775,60.094 h0.6
  text "IO10" at 50.508,59.739 h0.7
  text "IO21" at 40.545,59.642 h0.7
  text "N" at 39.829,59.376 h0.6
  text "P" at 34.818,59.238 h0.6
  text "S4L8" at 46.827,59.156 h0.7
  text "IO12" at 35.56,58.687 h0.7
  text "IO11" at 50.508,58.572 h0.7
  text "P" at 44.785,58.25 h0.6
  text "S4L9" at 31.074,58.178 h0.7
  text "N" at 49.775,58.094 h0.6
  text "IO0" at 45.487,57.824 h0.7
  text "IO13" at 35.56,57.52 h0.7
  text "P" at 29.834,57.294 h0.6
  text "M4Tx" at 41.35,57.198 h0.7
  text "N" at 34.818,57.154 h0.6
  text "IO4" at 30.482,56.825 h0.7
  text "IO1" at 45.487,56.657 h0.7
  text "S4L5" at 26.417,56.24 h0.7
  text "P" at 54.793,56.204 h0.6
  text "N" at 44.785,56.166 h0.6
  text "sBUS0" at 55.771,55.703 h0.7
  text "IO5" at 30.482,55.658 h0.7
  text "P" at 39.76,55.368 h0.6
  text "N" at 29.834,55.21 h0.6
  text "S3L7" at 51.727,55.139 h0.7
  text "sBUS4" at 40.656,54.922 h0.7
  text "sBUS1" at 55.771,54.541 h0.7
  text "S3L9" at 36.437,54.35 h0.7
  text "P" at 49.787,54.246 h0.6
  text "N" at 54.793,54.12 h0.6
  text "sBUS5" at 40.656,53.88 h0.7
  text "P" at 34.844,53.318 h0.6
  text "N" at 39.76,53.283 h0.6
  text "M3Tx" at 46.909,53.175 h0.7
  text "Vaux1" at 50.574,53.17 h0.7
  text "S3L5" at 31.8,52.25 h0.7
  text "Vaux2" at 35.526,52.233 h0.7
  text "N" at 49.787,52.161 h0.6
  text "N" at 34.844,51.233 h0.6
  text "GND" at 41.734,50.758 h0.7
  text "P" at 29.767,50.624 h0.6
  text "IO100" at 30.591,50.119 h0.7
  text "S8L3" at 26.55,49.675 h0.7
  text "IO101" at 30.591,48.952 h0.7
  text "N" at 29.767,48.54 h0.6
  text "P" at 39.927,48.225 h0.6
  text "Distributed I/O Tier  / System Board and Peripheral / Extender Card" at 131.7,47.7 h1.5
  text "IO92" at 40.702,47.665 h0.7
  text "N" at 54.777,47.14 h0.6
  text "S6L3" at 36.972,47.107 h0.7
  text "IO99" at 55.659,46.684 h0.7
  text "IO93" at 40.702,46.498 h0.7
  text "P" at 34.928,46.22 h0.6
  text "N" at 39.927,46.14 h0.6
  text "S7L4" at 51.945,46.103 h0.7
  text "IO84" at 35.624,45.607 h0.7
  text "IO98" at 55.659,45.517 h0.7
  text "N" at 49.779,45.17 h0.6
  text "S4L3" at 31.987,45.135 h0.7
  text "P" at 54.8,45.1 h0.6
  text "IO91" at 50.516,44.706 h0.7
  text "IO85" at 35.624,44.44 h0.7
  text "P" at 29.818,44.211 h0.6
  text "S5L4" at 46.927,44.155 h0.7
  text "N" at 34.928,44.135 h0.6
  text "IO76" at 30.571,43.687 h0.7
  text "IO90" at 50.516,43.539 h0.7
  text "N" at 44.789,43.199 h0.6
  text "S2L3" at 26.719,43.131 h0.7
  text "P" at 49.802,43.13 h0.6
  text "IO83" at 45.55,42.698 h0.7
  text "IO77" at 30.571,42.52 h0.7
  text "S3L4" at 41.906,42.298 h0.7
  text "P" at 39.862,42.176 h0.6
  text "N" at 29.818,42.127 h0.6
  text "IO82" at 45.55,41.531 h0.7
  text "IO68" at 40.599,41.392 h0.7
  text "N" at 54.817,41.237 h0.6
  text "P" at 44.812,41.159 h0.6
  text "S7L0" at 36.714,41.129 h0.7
  text "IO75" at 55.569,40.734 h0.7
  text "IO69" at 40.599,40.425 h0.7
  text "Licensed under CERN-OHL-W v2 or later" at 129.6,40.2 h1.5
  text "P" at 34.835,40.173 h0.6
  text "S8L1" at 51.922,40.177 h0.7
  text "N" at 39.862,40.091 h0.6
  text "IO60" at 35.538,39.628 h0.7
  text "IO74" at 55.569,39.567 h0.7
  text "N" at 49.772,39.191 h0.6
  text "P" at 54.84,39.197 h0.6
  text "S5L0" at 31.668,39.102 h0.7
  text "IO67" at 50.521,38.707 h0.7
  text "IO61" at 35.538,38.461 h0.7
  text "S6L1" at 47.104,38.173 h0.7
  text "P" at 29.826,38.146 h0.6
  text "N" at 34.835,38.089 h0.6
  text "IO52" at 30.595,37.585 h0.7
  text "IO66" at 50.521,37.54 h0.7
  text "P" at 44.79,37.223 h0.6
  text "P" at 49.795,37.151 h0.6
  text "S3L0" at 26.694,37.094 h0.7
  text "IO58" at 45.658,36.718 h0.7
  text "IO53" at 30.595,36.418 h0.7
  text "S4L1" at 42.037,36.16 h0.7
  text "P" at 39.867,36.116 h0.6
  text "N" at 29.826,36.062 h0.6
  text "IO59" at 45.658,35.551 h0.7
  text "N" at 54.79,35.267 h0.6
  text "N" at 44.79,35.138 h0.6
  text "S7L2" at 36.649,35.08 h0.7
  text "Vext4" at 40.646,35.046 h0.7
  text "IO51" at 55.562,34.718 h0.7
  text "S2L1" at 52.072,34.182 h0.7
  text "P" at 34.811,34.167 h0.6
  text "N" at 39.867,34.032 h0.6
  text "IO50" at 55.562,33.551 h0.7
  text "N" at 49.769,33.238 h0.6
  text "P" at 54.815,33.177 h0.6
  text "S3L2" at 30.944,33.089 h0.7
  text "Vext3" at 50.532,32.186 h0.7
  text "S6L2" at 46.953,32.126 h0.7
  text "N" at 34.811,32.083 h0.6
  text "P_RST" at 26.113,31.416 h0.7
  text "N" at 44.767,31.24 h0.6
  text "P" at 49.794,31.147 h0.6
  text "2023 / v1.0" at 132,30.5 h3
  text "S2L2" at 41.884,30.15 h0.7
  text "M_SCL" at 35.918,29.759 h0.7
  text "P" at 54.783,29.264 h0.6
  text "P" at 44.792,29.149 h0.6
  text "M_SDA" at 35.918,28.667 h0.7
  text "S7L15" at 51.34,28.167 h0.7
  text "F_RST" at 30.75,27.86 h0.7
  text "N" at 49.779,27.23 h0.6
  text "N" at 54.783,27.179 h0.6
  text "P_PRES1" at 30.077,26.642 h0.7
  text "S6L15" at 46.273,26.15 h0.7
  text "P_PRES0" at 24.36,25.456 h0.7
  text "N" at 44.775,25.191 h0.6
  text "P" at 49.803,25.14 h0.6
  text "S2L15" at 41.259,24.147 h0.7
  text "S3L15" at 36.1,23.337 h0.7
  text "N" at 54.78,23.245 h0.6
  text "P" at 44.8,23.1 h0.6
  text "P" at 34.855,22.253 h0.6
  text "S2L8" at 51.795,22.13 h0.7
  text "N" at 49.812,21.237 h0.6
  text "S2L9" at 30.945,21.152 h0.7
  text "P" at 54.805,21.154 h0.6
  text "L4" at 50.569,20.21 h0.7
  text "N" at 34.855,20.169 h0.6
  text "S2L5" at 46.861,20.163 h0.7
  text "GND" at 39.053,19.176 h0.7
  text "P" at 49.837,19.146 h0.6
  text "P" at 44.815,18.796 h0.6
  text "S1L8" at 42.103,17.726 h0.7
  text "L7" at 45.515,17.722 h0.7
  text "P" at 29.882,17.343 h0.6
  text "N" at 44.815,16.712 h0.6
  text "S1L9" at 26.663,16.292 h0.7
  text "L10" at 30.622,16.289 h0.7
  text "P" at 54.785,16.123 h0.6
  text "N" at 29.882,15.259 h0.6
  text "P" at 34.661,15.268 h0.6
  text "Tx" at 55.609,15.147 h0.7
  text "M1Tx" at 51.849,15.115 h0.7
  text "PE_CLK" at 35.385,14.208 h0.7
  text "N" at 54.785,14.038 h0.6
  text "P" at 49.79,13.722 h0.6
  text "N" at 34.661,13.184 h0.6
  text "S1L2" at 47.012,12.659 h0.7
  text "L2" at 50.525,12.673 h0.7
  text "N" at 49.79,11.638 h0.6
  text "P" at 40.006,11.584 h0.6
  text "P" at 44.827,11.245 h0.6
  text "S1L3" at 36.93,10.43 h0.7
  text "L4" at 40.676,10.428 h0.7
  text "S1L1" at 42.323,10.161 h0.7
  text "L0" at 45.557,10.143 h0.7
  text "sBUS3" at 26,9.925 h0.7
  text "N" at 40.006,9.499 h0.6
  text "N" at 44.827,9.161 h0.6
  text "P" at 54.785,8.811 h0.6
  text "PRST_N" at 30.122,8.748 h0.7
  text "PRST_N" at 35.456,8.763 h0.7
  text "PS_ON_N" at 49.5,8 h0.7
  text "L15" at 55.615,7.707 h0.7
  text "SERVMOD" at 35.512,7.659 h0.7
  text "GND" at 31.785,7.606 h0.7
  text "RST_N" at 51.05,7.134 h0.7
  text "N" at 54.785,6.727 h0.6
  text "sBUS0" at 50.524,5.874 h0.7
  text "sBUS0" at 46.185,5.855 h0.7
  text "P5V0MP" at 30.57,5.608 h0.7
  text "P5V0MP" at 25.55,5.59 h0.7
  text ".Layer_Name" at 133.7,-50.1 h1.91